# EAGLE board actpcb (EAGLE 4.11)
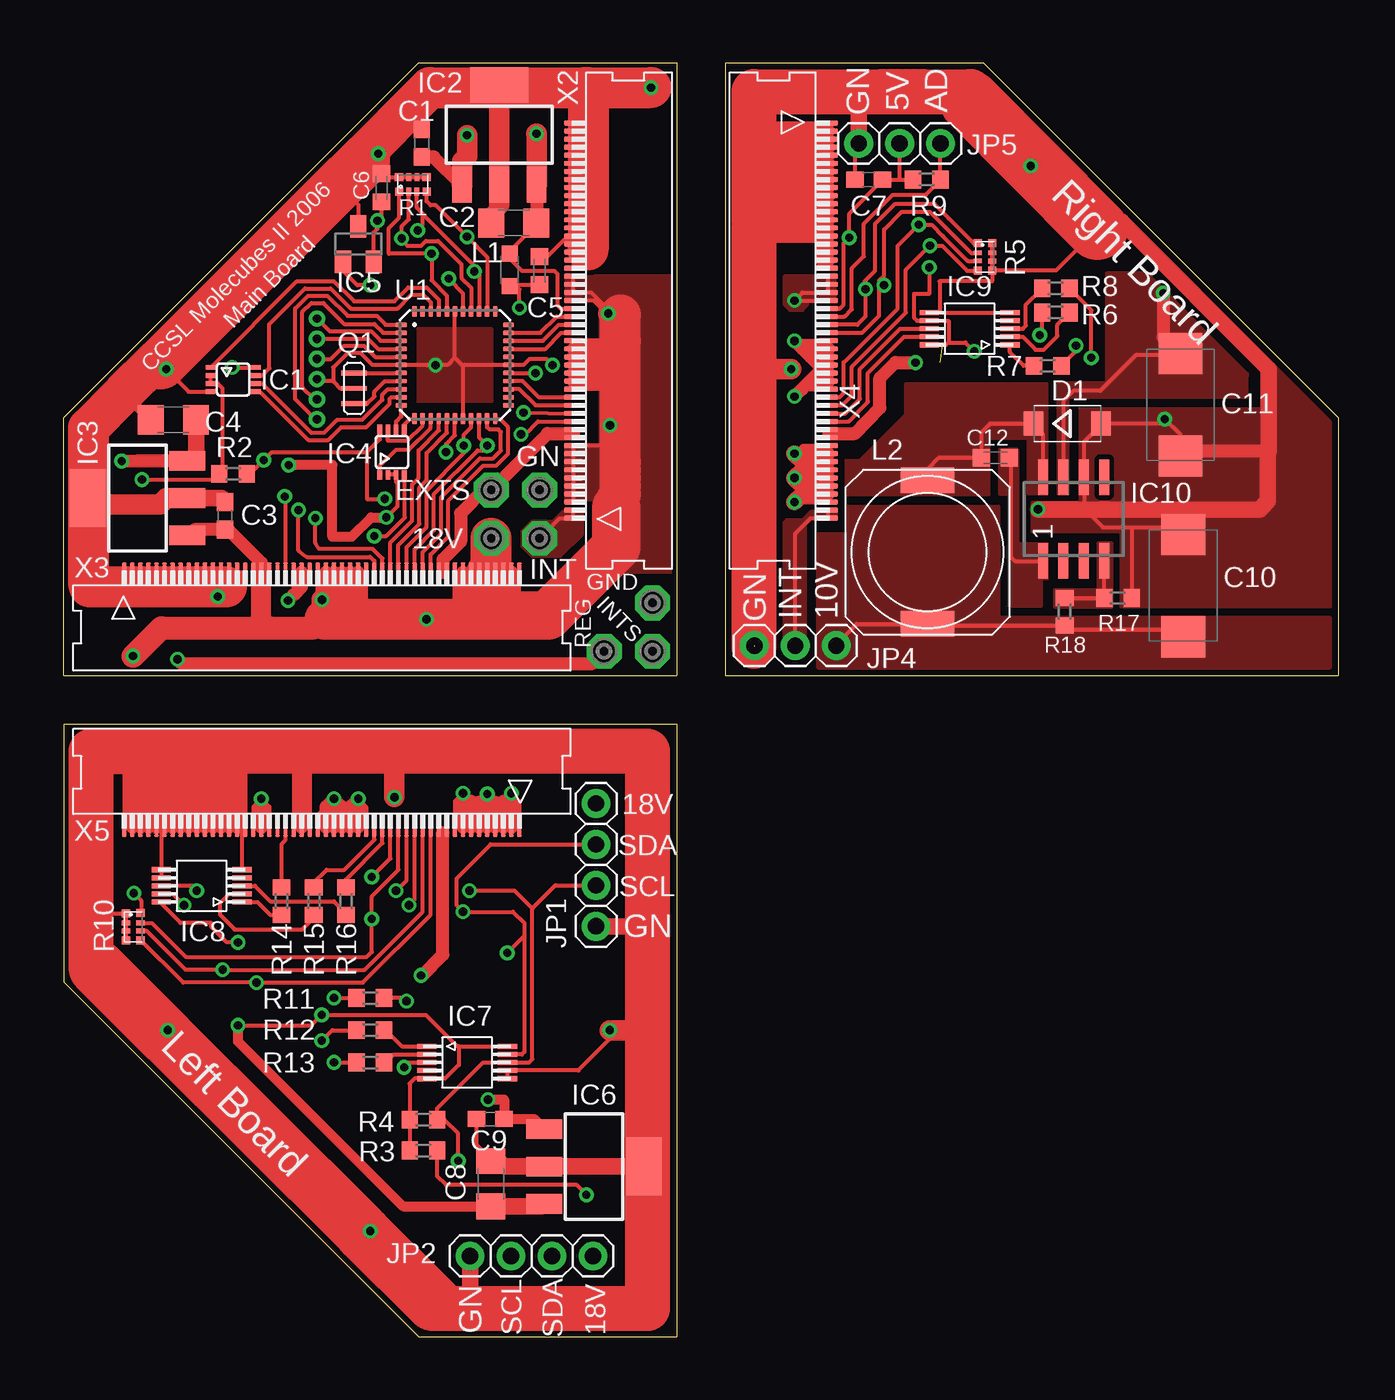
[diagram p0: board, top side]
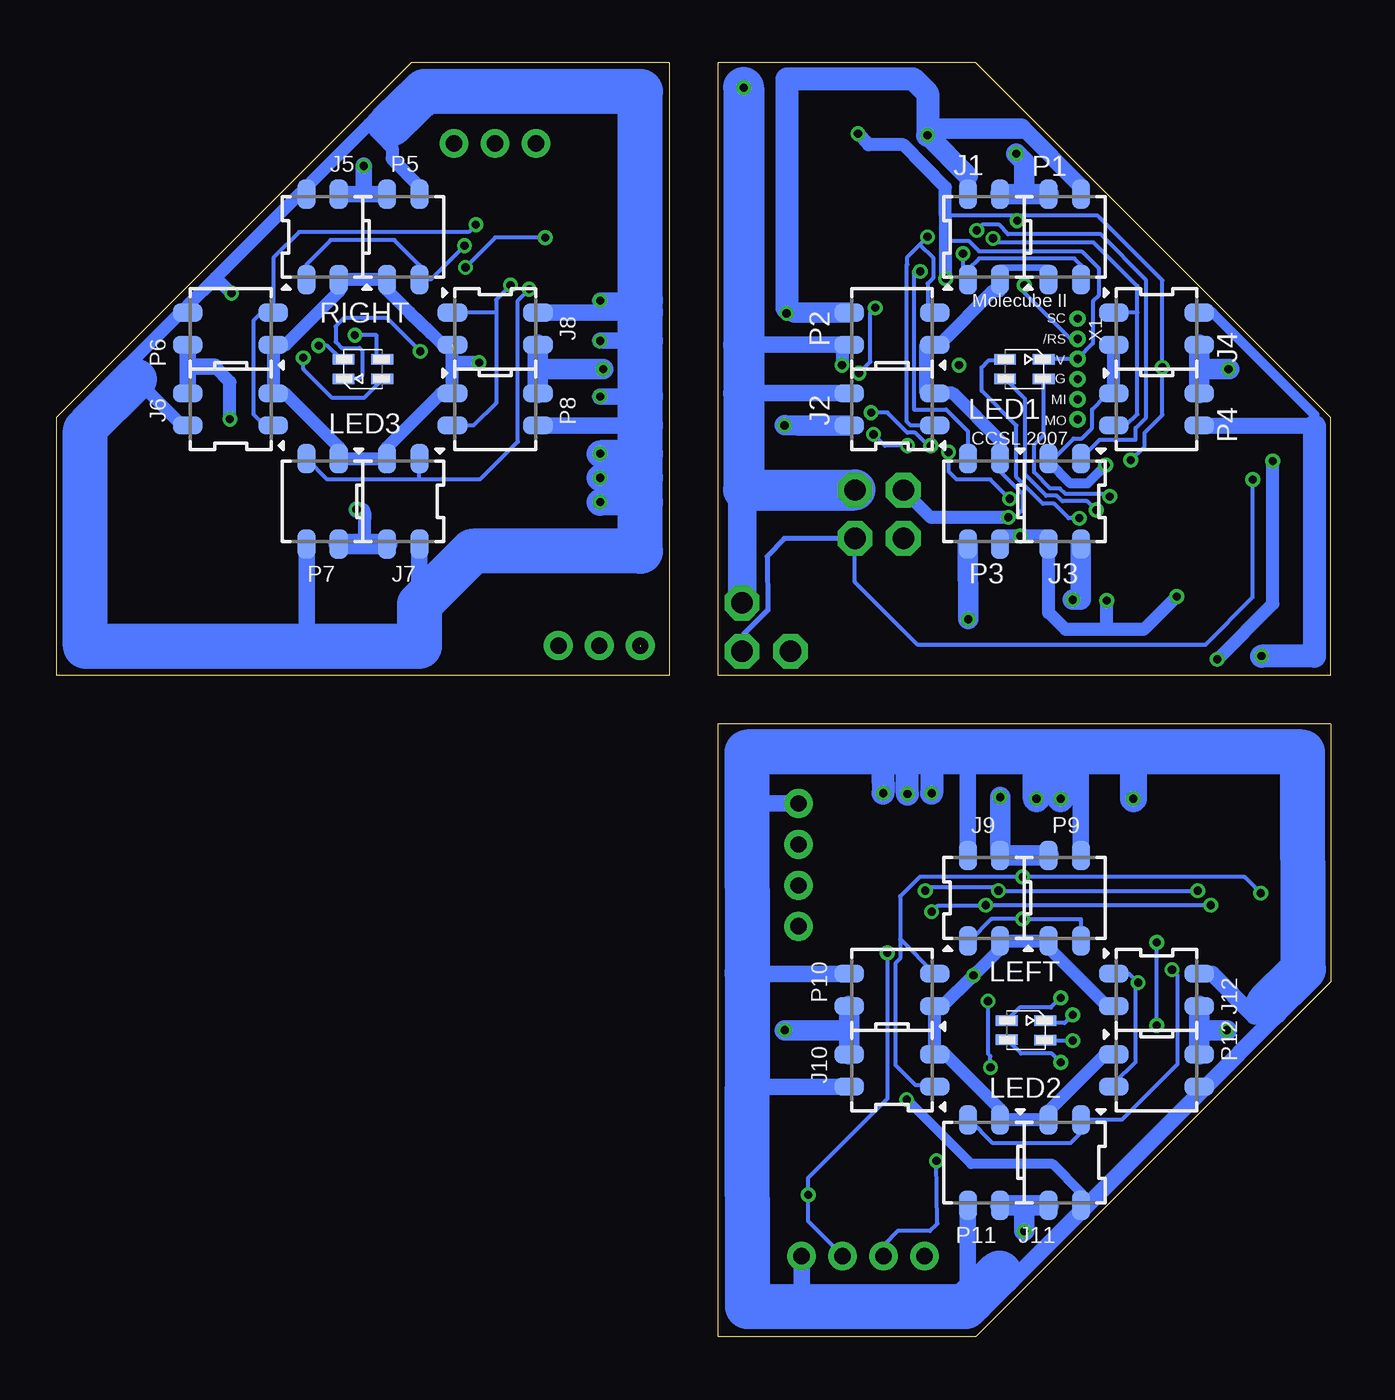
[diagram p1: board, bottom side, seen from below]

Size 79 x 79 mm. Coordinates in mm from the lower left corner, seen from the top.
Outline: 0,41 0,57 22,79 38,79 38,41 0,41
Outline: 38,38 38,0 22,0 0,22 0,38 38,38
Outline: 41,79 57,79 79,57 79,41 41,41 41,79
Copper layers (1*16): Top 0.035mm / dielectric 1.5mm / Bottom 0.035mm
Design rules "default": minimum track width 10mil, minimum drill 16mil, track to track 7mil, track to pad 7mil, pad to pad 7mil, via to via 7mil, smd to smd 7mil, copper to edge 10mil, drill to drill 8mil, minimum pad ring 10mil, minimum via ring 8mil, stop-mask expansion 4mil, vias tented up to drill 0mil, thermal gap 10mil

## Footprints (pad centres in the part's own frame; a part is rotated, then mirrored left to right if it is on the bottom)
MCS10B = drill 1.321 pad 2.159 octagon: MP 0,0
C0603 = smd 1.1 x 1: 1 -0.85,0; 2 0.85,0
C1206 = smd 1.6 x 1.8: 1 -1.4,0; 2 1.4,0
C0603K = smd 1.05 x 1.08: 1 -0.875,0; 2 0.875,0
D/7343-31R = smd 2.55 x 2.7: + 3.175,0; - -3.175,0
SMA = smd 1.2 x 1.5: A 2.1,0; C -2.1,0
VSSOP-8 = smd 0.3 x 0.6: 1 -0.75,-1.4; 2 -0.25,-1.4; 3 0.25,-1.4; 4 0.75,-1.4; 5 0.75,1.4; 6 0.25,1.4; 7 -0.25,1.4; 8 -0.75,1.4
SOT223 = smd 1.219 x 2.235: 1 -2.311,-3.099; 2 0,-3.099; 3 2.311,-3.099 | smd 3.6 x 2.2: 4 0,3.099
SOT23C = smd 1 x 1.4: 1 -0.95,-1.1; 2 0.95,-1.1; 3 0,1.1
TSSOP10 = smd 0.32 x 1.2: P$1 -1,-2.5; P$2 -0.5,-2.5; P$3 0,-2.5; P$4 0.5,-2.5; P$5 1,-2.5; P$6 1,2.5; P$7 0.5,2.5; P$8 0,2.5; P$9 -0.5,2.5; P$10 -1,2.5
SOP-08 = smd 0.6 x 2.2: 1 -1.905,-2.6; 2 -0.635,-2.6; 3 0.635,-2.6; 4 1.905,-2.6; 5 1.905,2.6; 6 0.635,2.6; 7 -0.635,2.6; 8 -1.905,2.6
79109-04 = smd 1.12 x 1.83: 1 -1,-2.65; 2 -1,2.65; 3 1,-2.65; 4 1,2.65
1X04R = drill 1.016 pad 1.778 round: 1 -3.81,0; 2 -1.27,0; 3 1.27,0; 4 3.81,0
1X03R = drill 1.016 pad 1.778 round: 1 -2.54,0; 2 0,0; 3 2.54,0
L2012C = smd 1 x 1: 1 -1,0; 2 1,0
DR1050 = smd 3.3 x 1.6: 1 0,4.45; 2 0,-4.45
OVSTRGBAC6V2 = smd 1.35 x 0.65: 1 -1.2,-0.6; 2 -1.2,0.6; 3 1.2,-0.595; 4 1.2,0.598
79109-041 = smd 1.12 x 1.83: 1 -1,-2.65; 2 -1,2.65; 3 1,-2.65; 4 1,2.65
CSTCE = smd 0.3 x 1.6: 1 -0.95,0; 2 0,0; 3 0.95,0
0402X4 = smd 0.5 x 0.5: 1 -0.845,-0.45; 4 0.853,-0.45; 5 0.848,0.45; 8 -0.855,0.45 | smd 0.3 x 0.5: 2 -0.25,-0.45; 3 0.245,-0.45; 6 0.255,0.45; 7 -0.25,0.45
R0603 = smd 1 x 1.1: 1 -0.85,0; 2 0.85,0
MLF44@1 = smd 0.7 x 0.3: 1 -3.325,2.5; 2 -3.325,2; 3 -3.325,1.5; 4 -3.325,1; 5 -3.325,0.5; 6 -3.325,0; 7 -3.325,-0.5; 8 -3.325,-1; 9 -3.325,-1.5; 10 -3.325,-2; 11 -3.325,-2.5; 23 3.325,-2.5; 24 3.325,-2; 25 3.325,-1.5; 26 3.325,-1; 27 3.325,-0.5; 28 3.325,0; 29 3.325,0.5; 30 3.325,1; 31 3.325,1.5; 32 3.325,2; 33 3.325,2.5 | smd 0.3 x 0.7: 12 -2.5,-3.325; 13 -2,-3.325; 14 -1.5,-3.325; 15 -1,-3.325; 16 -0.5,-3.325; 17 0,-3.325; 18 0.5,-3.325; 19 1,-3.325; 20 1.5,-3.325; 21 2,-3.325; 22 2.5,-3.325; 34 2.5,3.325; 35 2,3.325; 36 1.5,3.325; 37 1,3.325; 38 0.5,3.325; 39 0,3.325; 40 -0.5,3.325; 41 -1,3.325; 42 -1.5,3.325; 43 -2,3.325; 44 -2.5,3.325
53047-06V1 = drill 0.508 pad 0.698 round: 1 3.125,0; 2 1.875,0; 3 0.625,0; 4 -0.625,0; 5 -1.875,0; 6 -3.125,0
05A02-50SM = smd 0.3 x 1.2: 1 -12.25,2.4; 2 -11.75,2.4; 3 -11.25,2.4; 4 -10.75,2.4; 5 -10.25,2.4; 6 -9.75,2.4; 7 -9.25,2.4; 8 -8.75,2.4; 9 -8.25,2.4; 10 -7.75,2.4; 11 -7.25,2.4; 12 -6.75,2.4; 13 -6.25,2.4; 14 -5.75,2.4; 15 -5.25,2.4; 16 -4.75,2.4; 17 -4.25,2.4; 18 -3.75,2.4; 19 -3.25,2.4; 20 -2.75,2.4; 21 -2.25,2.4; 22 -1.75,2.4; 23 -1.25,2.4; 24 -0.75,2.4; 25 -0.25,2.4; 26 0.25,2.4; 27 0.75,2.4; 28 1.25,2.4; 29 1.75,2.4; 30 2.25,2.4; 31 2.75,2.4; 32 3.25,2.4; 33 3.75,2.4; 34 4.25,2.4; 35 4.75,2.4; 36 5.25,2.4; 37 5.75,2.4; 38 6.25,2.4; 39 6.75,2.4; 40 7.25,2.4; 41 7.75,2.4; 42 8.25,2.4; 43 8.75,2.4; 44 9.25,2.4; 45 9.75,2.4; 46 10.25,2.4; 47 10.75,2.4; 48 11.25,2.4; 49 11.75,2.4; 50 12.25,2.4

## Placement (x,y rotation side)
18V  MCS10B  [MCS10B]  26.5,49.5 0 top
C1  [C0603]  22.2,74 90 top
C2  [C1206]  27.9,69.05 180 top
C3  [C0603]  10,50.9 90 top
C4  [C1206]  6.8,56.85 180 top
C5  [C0603K]  29.5,66.1 270 top
C6  [C0603K]  19.71,71.24 90 top
C7  [C0603]  49.9,71.75 180 top
C8  [C1206]  26.48,9.48 90 top
C9  [C0603]  26.44,13.5 180 top
C10  [D/7343-31R]  69.4,46.57 270 top
C11  [D/7343-31R]  69.23,57.78 90 top
C12  [C0603K]  57.75,54.5 180 top
D1  [SMA]  62.21,56.62 0 top
EXTS  1W  [MCS10B]  26.5,52.5 0 top
GN  MCS10B  [MCS10B]  29.5,52.5 0 top
GND  MCS10B  [MCS10B]  36.5,45.5 0 top
IC1  [VSSOP-8]  10.5,59.35 270 top
IC2  [SOT223]  27,74.53 0 top
IC3  [SOT223]  4.57,52 90 top
IC4  [VSSOP-8]  20.35,54.85 0 top
IC5  [SOT23C]  18.26,67.74 0 top
IC6  [SOT223]  32.88,10.55 270 top
IC7  PCA9633  [TSSOP10]  25,17 270 top
IC8  PCA9633  [TSSOP10]  8.55,27.95 90 top
IC9  PCA9633  [TSSOP10]  56.15,62.5 90 top
IC10  LM2675SOP08  [SOP-08]  62.6,50.7 0 top
INT  MCS10B  [MCS10B]  29.5,49.5 0 top
INTS  MCS10B  [MCS10B]  36.5,42.5 0 top
J1  [79109-04]  21.5,68.2 0 bottom
J2  [79109-04]  27.2,57.5 90 bottom
J3  [79109-04]  16.5,51.8 180 bottom
J4  [79109-04]  10.8,62.5 270 bottom
J5  [79109-04]  62.5,68.2 0 bottom
J6  [79109-04]  68.2,57.5 90 bottom
J7  [79109-04]  57.5,51.8 180 bottom
J8  [79109-04]  51.8,62.5 270 bottom
J9  [79109-04]  21.5,27.2 0 bottom
J10  [79109-04]  27.2,16.5 90 bottom
J11  [79109-04]  16.5,10.8 180 bottom
J12  [79109-04]  10.8,21.5 270 bottom
JP1  [1X04R]  33,29.25 90 top
JP2  [1X04R]  29,5 0 top
JP4  [1X03R]  45.35,42.85 0 top
JP5  [1X03R]  51.82,73.99 0 top
L1  [L2012C]  27.65,66.15 270 top
L2  [DR1050]  53.55,48.65 0 top
LED1  [OVSTRGBAC6V2]  19,60 180 bottom
LED2  [OVSTRGBAC6V2]  18.9,19 180 bottom
LED3  [OVSTRGBAC6V2]  60,60 0 bottom
P1  [79109-041]  16.5,68.2 0 bottom
P2  [79109-041]  27.2,62.5 90 bottom
P3  [79109-041]  21.5,51.8 180 bottom
P4  [79109-041]  10.8,57.5 270 bottom
P5  [79109-041]  57.5,68.2 0 bottom
P6  [79109-041]  68.2,62.5 90 bottom
P7  [79109-041]  62.5,51.8 180 bottom
P8  [79109-041]  51.8,57.5 270 bottom
P9  [79109-041]  16.5,27.2 0 bottom
P10  [79109-041]  27.2,21.5 90 bottom
P11  [79109-041]  21.5,10.8 180 bottom
P12  [79109-041]  10.8,16.5 270 bottom
Q1  [CSTCE]  18,58.8 270 top
R1  [0402X4]  21.64,71.46 0 top
R2  [R0603]  10.5,53.5 180 top
R3  [R0603]  22.3,11.55 0 top
R4  [R0603]  22.3,13.45 0 top
R5  [0402X4]  57.1,66.95 270 top
R6  [R0603]  61.5,63.5 180 top
R7  [R0603]  61,60.2 0 top
R8  [R0603]  61.5,65 0 top
R9  [R0603]  53.5,71.75 0 top
R10  [0402X4]  4.31,25.41 270 top
R11  [R0603]  19,21 180 top
R12  [R0603]  19,19 180 top
R13  [R0603]  19,17 180 top
R14  [R0603]  13.5,27 90 top
R15  [R0603]  15.5,27 90 top
R16  [R0603]  17.5,27 90 top
R17  [R0603]  65.35,45.8 180 top
R18  [R0603]  62.05,44.95 270 top
REG  MCS10B  [MCS10B]  33.5,42.5 0 top
U1  [MLF44@1]  24.25,60.25 0 top
X1  [53047-06V1]  15.7,60 270 bottom
X2  [05A02-50SM]  34,63 90 top
X3  [05A02-50SM]  16,45 0 top
X4  [05A02-50SM]  45,63 270 top
X5  [05A02-50SM]  16,34 180 top

## Library data of the parts
18V EXTS GN GND INT INTS REG = solpad
C1-C12 L1 L2 R2-R4 R6-R9 R11-R18 = rcl
D1 = diode
IC1 IC4 = 74xx-us
IC2 IC3 IC6 = linear-technology
IC5 = linear-technology-2
IC7-IC9 LED1-LED3 = rgb_led
IC10 = v-reg
J1-J12 P1-P12 = con-headers-jp
JP1 JP2 JP4 JP5 = pinhead
Q1 = murata-resonators
R1 R5 R10 = resistor-bourns
U1 = atmel
X1 = con-molex
X2-X5 = con-jst

## Nets
10V-R: C10.+ JP4.3 L2.2 R18.2
18V-L: C9.1 IC6.1 J9.2 J10.2 J11.2 J12.2 JP1.4 JP2.4 P9.4 P10.4 P11.4 P12.4 X5.1 X5.2 X5.3 X5.4 X5.5 X5.6 X5.7 X5.8 X5.9 X5.20 X5.21 X5.22 X5.23 X5.24 X5.25 X5.26 X5.32 X5.33 X5.34
+18V: 18V.MP C1.1 C3.1 IC2.1 IC3.1 J1.2 J2.2 J3.2 J4.2 P1.4 P2.4 P3.4 P4.4 X2.3 X2.4 X2.5 X2.6 X2.7 X2.8 X2.9 X2.10 X2.17 X2.18 X2.19 X2.20 X2.21 X2.22 X2.23 X2.28 X2.29 X2.30 X2.31 X3.17 X3.18 X3.19 X3.25 X3.26 X3.27 X3.28 X3.29 X3.30 X3.31 X3.42 X3.43 X3.44 X3.45 X3.46 X3.47 X3.48 X3.49 X3.50
ADC-R: JP5.3 R9.2 X4.25
BCH_M: LED1.3 X3.33
GCH_M: LED1.4 X3.32
GND: C1.2 C2.2 C3.2 C4.2 C5.1 C6.2 GN.MP GND.MP IC1.4 IC2.2 IC2.4 IC3.2 IC3.4 IC4.4 IC5.3 J1.4 J2.4 J3.4 J4.4 P1.2 P2.2 P3.2 P4.2 Q1.2 R1.5 R1.6 R1.7 R1.8 U1.6 U1.18 U1.28 U1.39 X1.3 X2.32 X2.33 X2.34 X2.35 X2.36 X2.37 X2.38 X2.39 X2.40 X2.41 X2.42 X2.43 X2.44 X2.45 X2.46 X2.47 X2.48 X2.49 X2.50 X3.1 X3.2 X3.3 X3.4 X3.5 X3.6 X3.7 X3.8 X3.9 X3.10 X3.11 X3.12 X3.13 X3.14 X3.15 X3.16 X3.22 X3.23 X3.24
GND-R: C7.2 C10.- C11.- D1.A IC9.P$5 IC9.P$6 IC10.6 J5.4 J6.4 J7.4 J8.4 JP4.1 JP5.1 P5.2 P6.2 P7.2 P8.2 R5.5 R5.6 R5.7 R5.8 R17.1 X4.1 X4.2 X4.3 X4.4 X4.5 X4.6 X4.7 X4.8 X4.9 X4.10 X4.11 X4.12 X4.13 X4.14 X4.15 X4.16 X4.17 X4.18 X4.19
GND_2: C8.2 C9.2 IC6.2 IC6.4 IC7.P$6 IC7.P$7 IC8.P$5 IC8.P$6 IC8.P$7 J9.4 J10.4 J11.4 J12.4 JP1.1 JP2.1 P9.2 P10.2 P11.2 P12.2 R10.1 R10.2 R10.3 R10.4 X5.27 X5.28 X5.29 X5.35 X5.36 X5.37 X5.38 X5.39 X5.40 X5.41 X5.42 X5.43 X5.44 X5.45 X5.46 X5.47 X5.48 X5.49 X5.50
INTS: IC1.2 IC1.3 INT.MP INTS.MP R2.2 X2.1 X2.2
N$1: Q1.1 U1.7
N$2: Q1.3 U1.8
N$3: IC1.6 U1.9
N$4: IC1.5 U1.10
N$6: IC4.6 U1.11
N$7: IC4.5 U1.12
N$8: IC7.P$1 R12.1
N$9: IC4.1 U1.14
N$10: U1.20 X2.13 X3.37
N$11: IC4.7 U1.13
N$12: U1.22 X3.39
N$13: U1.21 X3.38
N$14: U1.2 X1.2
N$15: U1.1 X1.1
N$16: U1.16 X3.35
N$17: U1.15 X3.34
N$18: U1.19 X2.14 X3.36
N$19: LED2.2 R12.2
N$20: IC9.P$8 X4.37
N$21: IC9.P$9 X4.38
N$22: C12.1 IC10.1
N$23: IC7.P$2 R13.1
N$24: J2.1 P2.3 R1.4 U1.35
N$25: IC7.P$3 R11.1
N$26: J1.1 P1.3 R1.1 U1.40
N$27: U1.30 X2.24
N$28: U1.31 X2.25
N$29: U1.32 X2.26
N$30: JP4.2 X4.49 X4.50
N$31: U1.25 X2.15
N$32: U1.3 X1.6
N$33: J3.1 P3.3 R1.3 U1.36
N$34: U1.26 X2.16
N$35: IC9.P$1 R7.1
N$36: EXTS.MP IC4.2 IC4.3 J1.3 J2.3 J3.3 J4.3 P1.1 P2.1 P3.1 P4.1 X2.11 X2.12 X3.40 X3.41
N$37: IC5.1 U1.4 X1.5
N$38: IC1.7 U1.42
N$39: LED3.2 R7.2
N$40: J4.1 P4.3 R1.2 U1.37
N$41: IC1.1 U1.41
N$42: IC10.4 R17.2 R18.1
N$43: IC9.P$2 R6.1
N$44: LED3.4 R6.2
N$45: J7.1 P7.3 R5.1 X4.26
N$46: J5.3 J6.3 J7.3 J8.3 P5.1 P6.1 P7.1 P8.1 X4.39 X4.40
N$47: IC9.P$3 R8.1
N$48: J8.1 P8.3 R5.2 X4.27
N$49: LED2.3 R11.2
N$50: J6.1 P6.3 R5.3 X4.35
N$51: LED2.4 R13.2
N$52: J5.1 P5.3 R5.4 X4.36
N$54: J9.3 J10.3 J11.3 J12.3 P9.1 P10.1 P11.1 P12.1 X5.10 X5.11
N$56: LED3.3 R8.2
N$57: C12.2 D1.C IC10.8 L2.1
N$58: IC8.P$1 R14.1
N$59: C11.+ IC10.7 J5.2 J6.2 J7.2 J8.2 P5.4 P6.4 P7.4 P8.4 X4.20 X4.21 X4.22 X4.23 X4.28 X4.29 X4.30 X4.31 X4.32 X4.33 X4.34 X4.41 X4.42 X4.43 X4.44 X4.45 X4.46 X4.47 X4.48
N$60: IC8.P$2 R15.1
N$61: IC8.P$3 R16.1
N$62: R14.2 X5.30
N$63: J9.1 P9.3 R10.7 X5.16
N$64: J11.1 P11.3 R10.6 X5.13
N$65: R15.2 X5.19
N$66: J12.1 P12.3 R10.5 X5.12
N$67: R16.2 X5.18
N$68: C4.1 IC3.3 REG.MP
N$69: C2.1 C6.1 IC1.8 IC2.3 IC4.8 IC5.2 L1.1 LED1.1 R2.1 U1.5 U1.17 U1.38 X1.4 X2.27
N$75: C5.2 L1.2 U1.27
N$100: J10.1 P10.3 R10.8 X5.17
RCH_M: LED1.2 X3.21
SCL-L: IC7.P$8 IC8.P$8 JP1.2 JP2.2 R4.2 X5.15
SDA-L: IC7.P$9 IC8.P$9 JP1.3 JP2.3 R3.2 X5.14
VDD-R: C7.1 IC9.P$7 IC9.P$10 JP5.2 LED3.1 R9.1 X4.24
VDD_2: C8.1 IC6.3 IC7.P$5 IC7.P$10 IC8.P$10 LED2.1 R3.1 R4.1

## Tracks (layer width: path | path; a pad name or v marks a point on that pad's centre or on a via)
10V-R
  Top 0.254: C10.+ 69.4,43.65 69.2,43.85 62.3,43.84 R18.2 54.35,44.1 L2.2 49.15,44.2 47.85,42.9 JP4.3
  pour Top (isolate 0.254, no thermals): 46.75,49.75 46.75,41.5 78.5,41.5 78.5,44.55 57.95,44.55 57.95,51.45 48.5,51.45 48.5,49.75
18V-L  (via drill 0.51)
  Top 0.254: X5.20 18.75,32.85 v18.25,33.35 | X5.23 X5.22 | X5.34 11.75,32.85 v12.25,33.35 12.75,32.85 X5.32 | X5.26 15.75,32.35 16.25,32.85 | X5.9 24.25,33.2 v24.75,33.7 25.25,33.2 | 25.75,33.15 v26.25,33.65 26.75,33.15 | 27.25,33.2 v27.75,33.7 28.25,33.2 X5.1 | X5.7 X5.6 | IC6.1
  Top 0.61: IC6.1 29.15,13.5 C9.1 27.29,13.59 27.3,13.6 27.3,14.7 v26.3,14.7
  Top 0.813: X5.22 17.75,32.85 v18.25,33.35 X5.21 | v27.75,33.7 X5.2 | X5.25 16.25,32.85 v16.75,33.35 | v16.75,33.35 X5.24 | X5.23 17.25,32.85 v16.75,33.35 | v12.25,33.35 X5.33 | X5.6 25.75,33.15 | v26.25,33.65 X5.5 | v24.75,33.7 X5.8 | 25.25,33.2 X5.7 | 26.75,33.15 X5.4 | 27.25,33.2 X5.3
  Bottom 0.254: 36.35,33.05 | 36.2,33.05 36.35,33.05 | 36.35,33.05 36.34,33.06 | 32.8,1.85 32.81,1.86
  Bottom 0.61: 15.44,7.79 15.44,8.89 17.25,10.7 22.3,10.7 v26.3,14.7
  Bottom 0.813: 3.9,20.6 3.5,19.75
  Bottom 1.016: 20.55,3.95 19.75,3.5 15.44,7.79 | 7.9,15.35 15.44,7.79 | 3.5,19.75 7.9,15.35 | J11.2 15.5,7.9 15.44,7.79 | 22.5,2.5 P11.4 | 36.18,22.55 36.15,22.55 36.1,22.5 P10.4 | 36.17,15.5 J10.2 | 22.5,36.25 J9.2 | 15.5,36.25 P9.4 | 2,22.5 2.05,22.55 4.75,19.85 7.35,22.5 J12.2 | P12.4 8.05,15.5 7.9,15.35 | 36.34,33.06 JP1.4 | 32.81,1.86 JP2.4
  Bottom 1.27: 22.25,2.25 22.5,2.5
  Bottom 1.422: 27.8,36.25 v27.75,33.7 | 24.75,36.25 v24.75,33.7 | v26.25,33.65 26.25,36.25
  Bottom 1.676: v18.25,33.35 18.25,35.75 | 16.75,36.25 v16.75,33.35 | 12.25,36.25 v12.25,33.35
  Bottom 2.8: 20.55,3.95 22.25,2.25 22.65,1.85 32.8,1.85 36.15,1.85 36.17,15.5 36.18,22.55 36.2,33.05 36.2,36.25 27.8,36.25 24.75,36.25 22.5,36.25 16.75,36.25 15.5,36.25 12.25,36.25 1.75,36.25 1.7,22.8 2,22.5 3.9,20.6
+18V  (via drill 0.51)
  Top 0.254: X3.46 26.5,47.4 | 26.3,44.45 | 26.3,44.5 26.3,44.45 | 26.3,44.45 26.25,44.5 | 24.25,44.55 | 24.25,44.49 24.25,44.55 | 24.25,44.55 X3.42 | 25.75,44.49 X3.45 | 30,44.7 28.2,44.7 28.25,44.65 X3.50 | 18.25,44.55 | 18.25,44.49 18.25,44.55 | 17.75,44.6 | 17.75,44.49 17.75,44.6 | 11.75,43.9 11.75,43.95 X3.17 | 12.75,43.95 X3.19 | 18.75,44.49 X3.31 | 33.65,63.45 33.65,63.5 33.7,63.45 v33.75,63.45 33.95,63.5 32.7,64.75 X2.29 X2.30 X2.31 | 33.65,63.45 33.4,63.25 | 34.25,48.95 34.2,50.75 | 34.45,51.25 | 34.25,51.4 34.45,51.25 | 34.55,51.75 | 34.25,51.9 34.55,51.75 | 34.55,52.25 | 34.5,52.25 34.55,52.25 | 34.5,54.25 | 34.5,54.75 | 34.5,55.25 34.45,55.25 | 34.6,55.75 | 34.5,55.75 34.6,55.75 | 34.55,56.25 | 34.5,56.25 34.55,56.25 | 34.5,59.25 | 34.5,59.75 34.55,59.75 | 34.5,60.25 | 34.5,60.75 | 34.5,61.25 34.55,61.25 | 16.25,45.85 16.05,45.65 v16.01,45.69 15.96,45.69 15.75,45.9 X3.25 | 16.85,44.65 | 16.85,44.49 16.85,44.65 | 16.85,44.65 16.75,44.75 | 33.65,63.45 33.65,63.4 | X2.28 32.85,64.25 33.65,63.45 | 34.5,61.75 X2.23 | 34.5,60.3 34.45,60.25 | 34.5,58.75 X2.17 | IC3.1 7.65,49.7 7.75,49.7 | X2.3 X2.4 X2.5 X2.6 X2.7 X2.8 X2.9 X2.10 34.45,55.25 | 34.45,55.25 | 34.5,53.75
  Top 0.406: 24.69,72.89 24.95,73.15 24.95,74.45 v25,74.5
  Top 0.813: C1.1 22.95,73.15 24.7,71.4 | 16.01,44.5 15.5,44.5 15.5,43.95 | 24.75,44.49 X3.43 | 25.25,44.49 X3.44 | 26.75,44.5 X3.47 | 27.25,44.5 X3.48 | 27.75,44.5 X3.49 | 12.25,43.95 X3.18 12.25,48 10.2,50.05 C3.1 8.11,50.04 7.75,49.7 | 17.25,44.49 X3.28 | 17.75,44.49 X3.29 | 18.25,44.49 X3.30 | 16.25,45.85 X3.26 | 16.75,44.75 X3.27 | 34.5,61.25 X2.22 | 34.5,60.75 X2.21 | 34.45,60.25 X2.20 | 34.5,59.75 X2.19 | 34.5,59.25 X2.18
  Top 1.27: 16.21,44.49 16.01,44.5 v16.01,45.69 | 34.49,56.51 v33.86,56.51 | v25,74.5 25,73.2 24.95,73.15 24.7,72.9 24.7,71.45 | 24.7,71.4 24.7,71.45 | 34.5,63.35 v33.75,63.45 | IC2.1 24.7,71.45
  Top 1.422: 15.5,43.95 12.75,43.95 12.25,43.95 11.75,43.95 6.05,43.95 v4.3,42.2
  Top 2.54: 27.7,44.7 27.75,44.5 27.25,44.5 26.75,44.5 26.3,44.5 25.75,44.49 25.25,44.49 24.75,44.49 24.25,44.49 v22.49,44.49 18.75,44.49 18.25,44.49 | 18.25,44.49 | 17.75,44.49 18.25,44.49 | 17.75,44.49 | 17.75,44.49 17.25,44.49 17.45,44.49 16.85,44.49 16.21,44.49 | 34.25,51.4 34.25,51.9 34.5,52.25 34.5,52.75 34.5,53.25 34.5,53.75 34.5,54.25 34.5,54.75 34.5,55.25 | 34.5,55.25 | 34.5,55.25 34.5,55.75 34.5,56.25 34.49,56.51 34.5,58.75 34.5,59.25 34.5,59.75 34.5,60.25 34.5,60.3 34.5,60.75 34.5,61.25 34.5,61.75 34.5,63.35 | 26.5,47.4 18V.MP | 26.25,44.5 X3.46
  Top 3: 27.7,44.7 30,44.7 34.25,48.95 34.25,51.4
  Bottom 0.254: 33.24,63.51 33.29,64.96 33.3,64.95 v33.75,63.45
  Bottom 0.61: 15.5,71.35 P1.4 | v25,74.5 25,74.85 24.95,74.9 | 19.2,74.9 19.05,74.9 | J4.2 7.35,63.5 1,57.15 1,56.45
  Bottom 1.016: 22.5,72 J1.2 | 19.05,74.9 15.5,71.35 | 0.95,56.5 1,56.45 P4.4
  Bottom 1.27: v16.01,45.69 15.5,45.7 J3.2 | 33.7,63.8 33.24,63.51 P2.4 | v33.86,56.51 33,56.5 J2.2 | v22.49,44.49 P3.4 | v25,74.5 22.5,72 | 24.95,74.9 19.2,74.9
  Bottom 1.422: v25,74.5 25,77.1 25.9,78 33.7,78 33.7,63.8 | 1,56.45 1,42.2 v4.3,42.2
  pour Top (isolate 0.305, no thermals): 31.2,55.25 33.7,55.25 33.7,51.9 31.15,51.9 31.15,55.25 31.25,55.25
  pour Top (isolate 0.305, no thermals): 31.15,65.75 37.65,65.75 37.65,47.4 33.3,47.4 33.3,64.25 31.15,64.25
ADC-R
  Top 0.254: X4.25 48.4,63.25 48.85,63.7 48.85,66.25 49.45,66.85 49.6,67 49.6,69 51.4,70.8 53.45,70.8 54.35,71.7 R9.2 54.35,73.95 54.36,73.96 JP5.3
BCH_M  (via drill 0.51)
  Top 0.254: X3.33 19.75,48.25 19.15,48.85 15.85,48.85 15.6,49.2 v15.6,50.75
  Bottom 0.254: v15.6,50.75 16.25,50.75 17.15,51.65 17.85,51.65 19.5,53.3 19.5,56.5 21.65,58.65 21.65,60.1 21.2,60.55 20.2,60.55 LED1.3
GCH_M  (via drill 0.51)
  Top 0.254: X3.32 19.25,48.1 19,48.35 15.05,48.35 14.55,48.75 v14.55,51.25
  Bottom 0.254: v14.55,51.25 15.1,51.8 16.65,51.8 17,52.15 17.65,52.15 18.95,53.45 18.95,58.15 LED1.4
GND  (via drill 0.51, 0.51 pad 0.25)
  Top 0.254: X3.1 X3.2 X3.3 X3.4 5.7,47.4 | 5.7,47.4 X3.5 | 5.7,47.4 X3.6 X3.7 X3.8 X3.9 X3.10 | X3.10 8.3,47.4 | X3.11 8.8,47.4 | X3.11 X3.10 | X3.12 9.3,47.4 | X3.12 X3.11 | X3.13 9.8,47.4 | X3.13 X3.12 | X3.14 X3.13 | X3.14 X3.15 X3.16 | X3.14 10.25,46.65 10.1,46.5 | v19.5,73.35 19.1,72.4 | 19.1,72.4 19.25,72.25 | 19.3,71.5 19.3,72.1 19.25,72.15 19.25,72.3 18.95,72.6 | 18.62,72.92 18.95,72.6 | 32.5,77.4 32.5,77.45 | X3.22 14.25,46 v13.9,45.65 | X3.24 15.25,47 14.75,46.5 | 32.55,68.25 32.5,68.25 X2.36 | 32.65,67.75 32.5,67.75 X2.35 X2.34 X2.33 X2.32 | v30.3,60.25 29.95,60.6 28.85,60.6 28.5,60.25 27.6,60.25 27.57,60.23 27.55,60.25 | Q1.2 17.15,58.8 16.7,59.25 | 16.7,59.25 16.7,60.1 17.6,61 18.4,61 19.15,60.25 U1.6 22.5,60.25 | 24.25,60.7 23.8,60.25 22.5,60.25 | 24.25,60.7 24.7,60.25 24.75,60.25 | 27.55,60.25 24.75,60.25 | 24.75,60.25 U1.18 | 22.5,60.25 v23.05,60.25 | 24.25,60.7 U1.39 | 27,75.55 27,75.5 27,74.7 | X1.3 15.73,59.38 15.85,59.25 16.7,59.25 | IC1.4 7.75,58.6 v6.35,60 | R1.5 21.91,71.91 R1.6 21.41,71.91 R1.7 20.86,71.91 20.85,71.9 20.84,71.91 R1.8 19.59,71.91 19.1,72.4 | 16.5,70.8 17.11,70.79 | C6.2 19.29,72.27 18.95,72.6 | IC5.3 18.26,70.19 17.6,70.85 16.95,70.85 16.75,71.05 | IC4.4 21.15,53.4 21.15,50.8 20,49.65 v19.25,49.65 | C5.1 29.98,66.97 31,68 31.6,68 | 5.35,56.85 C4.2 | 27.55,60.25 U1.28 | 27,77.5 IC2.4
  Top 0.305: 32.5,67.4 31.6,68 | X2.36 X2.37 X2.38 31.6,69.7 | 31.6,69.7 X2.39 | 31.6,69.7 X2.40 31.6,70.7 | 31.6,70.7 X2.41 | 31.6,70.7 X2.42 X2.43 X2.44 X2.45 X2.46 X2.47 X2.48 X2.49 X2.50
  Top 0.406: 27.5,77.45 27,77.6
  Top 0.61: 3.7,58.5 5.35,56.85
  Top 0.813: 27,70.2 26.4,69.6 C2.2 | 22.2,76.95 C1.2 | v9.55,45.9 8.7,45.9 8.7,46.5 | X3.23 14.75,46.5 14.25,46
  Top 1.016: 27,75.55 27,76.95 27.5,77.45 | C3.2 9.8,52 IC3.2 6.35,52
  Top 1.27: 27,77.6 27,77.5 27,75.55 | 1.55,52 1.55,51.6 5.95,51.6 6.35,52 | v6.35,60 6,60.35 4.05,59.1 | v19.5,73.35 18.62,72.92 18.25,73.25 | 27,75.5 IC2.2 27,70.2
  Top 1.422: 1.55,52 IC3.4 1.4,52
  Top 2.54: 18.62,72.92 18.52,73.28 22.2,76.95 22.7,77.45 27.5,77.45 32.3,77.45 32.5,77.4 32.5,68.25 32.5,67.75 32.5,67.4 | 6,60.35 5.7,60.5 3.7,58.5 1.55,56.35 1.55,52 1.55,46.7 1.6,46.5 8.7,46.5 10.1,46.5 | 32.5,77.45 v36.4,77.45
  Top 3.2: 18.62,72.92 16.75,71.05 16.5,70.8 6,60.35
  Bottom 0.254: P2.2 30.3,61.05 | v9.55,45.9 9.5,45.95
  Bottom 0.406: P2.2 29.9,61.5
  Bottom 0.813: 13.9,43.85 11.6,43.85 v9.55,45.9 | 13.9,43.85 16.45,43.85 17.5,44.9 J3.4 17.5,49.65 v19.25,49.65 20.55,49.65 20.5,49.6 P3.2 | 13.9,43.85 v13.9,45.65 | 30.3,61.05 v30.3,60.25
  Bottom 1.016: 36.4,61.5 P2.2 | 36.4,58.5 J2.4
  Bottom 1.27: 36.4,61.5 36.55,61.5 | 8.15,60 J4.4 | 6.3,60 v6.35,60 8.15,60 | 8.15,60 P4.2 | 19,70.85 P1.2 | v19.5,73.35 19,72.85 19,70.85 | 19,70.85 J1.4
  Bottom 1.778: 36.4,52.5 36.4,52.85 36.5,52.75 GND.MP
  Bottom 2.54: GN.MP 36.4,52.5 36.4,58.5 36.4,61.5 v36.4,77.45
  pour Top: 22,62.5 26.5,62.5 26.5,58 22,58
GND-R  (via drill 0.51)  (1 unrouted)
  Top 0.254: 46.75,75.25 X4.1 42.8,75.25 | X4.3 46.75,74.25 | X4.7 46.7,72.25 | X4.11 46.7,70.25 | X4.13 46.7,69.25 | X4.15 46.7,68.25 | 42.8,74.25 42.7,74.25 | 42.8,73.75 42.75,73.75 | 42.8,73.25 42.75,73.25 | 42.8,70.25 42.75,70.25 | 42.8,66.25 42.8,69.1 46.8,69.1 46.8,66.25 X4.19 | 50.75,77.2 50.75,77.25 50.76,77.25 | 51.25,77.2 51.25,77.25 | 51.75,77.2 51.75,77.3 51.74,77.3 | 52.25,77.2 52.25,77.35 | 52.75,77.2 52.75,77.3 | 53.25,77.2 53.25,77.25 53.26,77.25 | 56.23,76.58 61.04,72.14 | 61.04,72.14 63.3,70.05 | R5.8 R5.7 R5.6 R5.5 | 51.35,77.2 | 54.3,63.5 IC9.P$5 | 54.3,63.5 IC9.P$6 | 61.05,72.14 61.05,72.15 | 61.04,72.14 61.05,72.14 | 61.05,72.14 61.05,71.15 | 64.08,68.68 64.1,68.7 | 64.08,68.68 | R5.5 61.5,66.1 64.08,68.68 | JP5.1 49.3,74 | JP5.1 | C7.2 49.05,73.75 JP5.1 | 54.3,63.5 54.3,65.45 57.55,65.45 R5.5 | 66.2,50.2 64.41,50.2 63.25,51.35 63.25,51.4 | 66.2,50.2 69.05,50.2 69.4,49.85 C10.- | 63.25,51.4 63.25,53.1 63.2,53.15 63.23,53.19 IC10.6 63.23,55.48 64.31,56.56 D1.A 67.97,56.62 v68.25,56.9 69.23,55.92 69.23,54.9 C11.- | 66.2,50.2 | 66.2,50.2 R17.1 | 62.5,51.2 63.05,51.2 63.25,51.4
  Top 0.813: 42.8,74.75 X4.2 | 42.8,74.25 X4.3 | 42.8,73.75 X4.4 | 42.8,73.25 X4.5 | 42.8,72.75 X4.6 | 42.8,72.25 X4.7 | 42.8,71.75 X4.8 | 42.8,71.25 X4.9 | 42.8,70.75 X4.10 | 42.8,70.25 X4.11 | 42.8,69.75 X4.12 | 42.8,69.25 X4.13 | 42.8,68.75 X4.14 | 42.8,68.25 X4.15 | 42.8,67.75 42.8,69.9 47.05,69.9 47.05,67.75 | 47.05,67.75 X4.16 | 42.8,67.25 42.8,69.35 | 42.8,69.35 46.95,69.35 46.95,67.25 X4.17 | 42.8,66.75 42.8,69.35 | 42.8,69.4 47.05,69.4 47.05,67.75 | 47.05,67.75 47.05,66.75 X4.18 | 56.23,76.58 v59.95,72.6 | D1.A 64.31,56.64 64.3,56.65 | 69.2,54.9 69.23,54.9 74.7,54.9 | 62.5,51.2 63,51.25 62.45,51.2
  Top 1.016: JP5.1 49.28,77.18 49.3,77.2 | 64.08,68.68 65.6,69.15 74.7,60 74.7,54.95 | 74.7,54.95 74.7,54.9 | v60.4,51.3 74.15,51.3 74.65,51.8 74.65,54.95 74.7,54.95
  Top 1.27: 42.8,60 v45.1,60
  Top 2.8: 56.23,76.58 56.2,77.2 53.25,77.2 52.75,77.2 52.25,77.2 51.75,77.2 51.35,77.2 51.25,77.2 50.75,77.2 49.3,77.2 42.8,77.2 42.8,75.25 42.8,74.75 42.8,74.25 42.8,73.75 42.8,73.25 42.8,72.75 42.8,72.25 42.8,71.75 42.8,71.25 42.8,70.75 42.8,70.25 42.8,69.75 42.8,69.4 42.8,69.35 42.8,69.25 42.8,68.75 42.8,68.25 42.8,67.75 42.8,67.25 42.8,66.75 42.8,66.25 42.8,60 42.8,42.8
  Top 3.81: 56.23,76.58 64.08,68.68
  Bottom 0.254: P7.2 59.95,49.15 59.95,49.25 59.95,50.25
  Bottom 0.813: v68.25,56.9 68.25,59.2 69.2,60.15 | P7.2 60.05,49.15 59.95,49.25 59.9,51.1 60.05,51.2
  Bottom 1.016: 59.95,70.85 J5.4 | v59.95,72.6 59.95,70.85 | 59.95,70.85 P5.2 | 70.85,60.15 J6.4 | 70.85,60.15 P6.2 | 69.2,60.15 70.85,60.15 | v60.4,51.3 60.05,51.2
  Bottom 1.27: P7.2 J7.4 | 49.15,60 J8.4 | v45.1,60 49.15,60 | 49.15,60 P8.2
  pour Top (isolate 0.305, no thermals): 63,57.55 63,51.7 60.05,51.7 60.05,49.95 65.55,49.95 65.55,45.3 78.5,45.3 78.5,56.7 75,60.2 74.25,60.2 74.25,57.5 63.05,57.5
GND_2  (via drill 0.51)
  Top 0.254: 3.75,36.3 X5.50 | 4.25,36.3 4.25,36.45 | 1.7,27.75 1.71,27.75 | 1.7,26.8 1.75,26.75 | 1.7,26.25 | 1.7,25.75 | 1.7,23.45 1.65,25.25 | 1.7,22.95 1.65,24.75 | 14.3,36.3 14.3,36.35 14.25,36.3 X5.29 | 15.25,36.4 15.25,36.3 X5.27 | 18.55,6.45 12.75,12.1 | 4.75,36.3 4.75,36.45 | 5.25,36.3 5.25,36.45 | 5.75,36.3 5.75,36.35 | 6.25,36.3 6.25,36.35 | 7.25,36.3 7.25,36.4 | 7.75,36.3 7.75,36.4 | 8.25,36.3 8.25,36.5 | 8.75,36.3 8.75,36.5 | 9.25,36.3 9.25,36.4 | 9.75,36.3 9.75,36.45 | 10.25,36.3 10.25,36.45 | 10.75,36.3 10.75,36.4 | 11.25,36.35 11.25,36.3 X5.35 11.2,31.6 11.05,31.45 IC8.P$5 | 1.7,25.9 1.65,25.9 1.66,25.91 | 2.95,26.2 2.96,26.21 | 2.95,26.2 2.96,26.19 | 1.7,26.2 2.85,26.2 | 2.85,26.2 2.95,26.2 | X5.45 6.05,31.4 IC8.P$6 IC8.P$7 | IC7.P$6 IC7.P$7 31.9,16.5 33.85,18.45 v33.85,19 | 25.2,1.75 25.2,1.8 25.19,1.81 | 36.2,25.45 36.25,25.45 36.24,25.44 | 3.85,24.6 3.86,24.59 R10.4 | 3.85,24.6 3.86,24.61 | R10.1 | R10.1 R10.2 3.86,25.64 R10.3 3.85,24.6 | 2.85,26.2 2.85,26.25 | 2.95,26.2 2.95,26.25 R10.1 | C8.2 26.48,11.02 25.6,11.9 25.6,13.45 25.59,13.46 C9.2
  Top 0.813: 4.25,36.3 X5.49 | 14.75,36.3 X5.28 | 4.75,36.3 X5.48 | 5.25,36.3 X5.47 | 5.75,36.3 X5.46 | 6.25,36.3 X5.45 | 6.75,36.3 X5.44 | 7.25,36.3 X5.43 | 7.75,36.3 X5.42 | 8.25,36.3 X5.41 | 8.75,36.3 X5.40 | 9.25,36.3 X5.39 | 9.75,36.3 X5.38 | 10.25,36.3 X5.37 | 10.75,36.3 X5.36
  Top 1.016: 25.19,1.81 JP2.1 | 36.24,25.44 JP1.1 | 36.2,10.55 IC6.4 IC6.2 27.3,10.55 26.97,10.88 C8.2
  Top 1.27: 36.2,19 v33.85,19 | 18.55,6.45 v19,6.55 | 5.85,18.6 6.47,18.48 v6.45,19 | v20.5,33.45 20.5,36.25 20.55,36.3
  Top 2.8: 22.9,2.1 22.9,1.9 23.05,1.75 25.2,1.75 36.2,1.75 36.2,10.55 36.2,19 36.2,25.45 36.2,36.3 20.55,36.3 15.25,36.3 14.75,36.3 14.3,36.3 11.25,36.3 10.75,36.3 10.25,36.3 9.75,36.3 9.25,36.3 8.75,36.3 8.25,36.3 7.75,36.3 7.25,36.3 6.75,36.3 6.25,36.3 5.75,36.3 5.25,36.3 4.75,36.3 4.25,36.3 3.75,36.3 1.7,36.3 1.7,27.75 1.7,26.8 1.7,26.25 1.7,26.2 1.7,25.9 1.7,25.75 1.7,23.45 1.7,22.95 2.05,22.9
  Top 3.5: 2.05,22.9 6.47,18.48 18.15,6.85 18.68,6.33 | 18.68,6.33 22.9,2.1 | 18.68,6.33 18.55,6.45
  Bottom 1.016: J9.4 P9.2
  Bottom 1.27: v33.85,19 29.85,19 | 29.85,19 P10.2 | 29.85,19 J10.4 | 18.95,8.15 J11.4 | v19,6.55 19,8.1 18.95,8.15 | 18.95,8.15 P11.2 | 8.15,19 J12.4 | 8.15,19 v6.45,19 | P12.2 8.15,19 | P9.2 20.4,29.85 20.45,29.8 J9.4 v20.5,33.45
INTS  (via drill 0.51)
  Top 0.254: v4.85,53.15 10,53.15 9.78,53.38 | 9.78,53.38 R2.2 | IC1.3 IC1.2 IC1.3 | IC1.3 9.55,59.1 9.85,58.8 9.85,53.45 9.78,53.38 | 9.78,53.38 9.75,53.35 | X2.2 X2.1 30.75,50.75 INT.MP
  Bottom 0.254: INT.MP 29.5,46.8 25.6,42.9 7.8,42.9 4.85,45.85 v4.85,53.15
  Bottom 0.305: INTS.MP 36.45,43.5 34.9,45.05 34.95,48.4 33.9,49.5 INT.MP
  pour Top (isolate 0.305, no thermals): 28.55,50.05 29.05,50.55 30.35,50.55 31.05,51.25 32.1,51.25 32.1,49.75 30.75,48.4 29.05,48.4 28.45,49 28.45,49.95
N$1
  Top 0.254: Q1.1 U1.7
N$2
  Top 0.254: Q1.3 18.8,57.85 19.25,58.3 19.25,58.6 19.9,59.25 U1.8
N$3
  Top 0.254: U1.9 20.1,58.75 19.75,58.4 19.75,58.1 18.5,56.85 16.95,56.85 16.15,56.05 15.35,56.05 12.3,59.1 IC1.6
N$4
  Top 0.254: U1.10 20.3,58.25 20.2,58.15 20.2,57.85 18.75,56.4 17.2,56.4 16.4,55.6 15.15,55.6 12.15,58.6 IC1.5
N$6
  Top 0.254: IC4.6 20.6,56.75 20.93,57.08 U1.11
N$7
  Top 0.254: U1.12 21.7,56.9 21.45,56.9 21.1,56.55 IC4.5
N$8
  Top 0.254: R12.1 19.95,19 20.95,18 IC7.P$1
N$9
  Top 0.254: U1.14 22.75,56.35 21.4,55 20.6,55 19.6,54 IC4.1
N$10  (via drill 0.51)
  Top 0.254: U1.20 25.75,55.75 v26.25,55.25 26.25,55.2 26,54.95 25.65,54.95 22.95,52.25 22.95,50 21.75,48.8 X3.37 | v28.35,55.95 28.6,55.95 29.4,56.75 X2.13
  Bottom 0.254: v28.35,55.95 27.65,55.25 v26.25,55.25
N$11
  Top 0.254: U1.13 22.25,56.5 21.3,55.55 20.1,55.55 IC4.7
N$12
  Top 0.254: X3.39 22.75,48.5 23.85,49.6 23.85,51.85 26,54 26.8,54 27.55,54.75 27.55,56.4 27.1,56.85 26.75,56.85 U1.22
N$13
  Top 0.254: X3.38 22.25,48.65 23.4,49.8 23.4,52.05 25.8,54.45 26.6,54.45 27.1,54.95 27.1,56.1 26.95,56.25 26.4,56.25 26.25,56.4 U1.21
N$14
  Top 0.254: U1.2 19.8,62.25 19.25,62.8 17.4,62.8 16.1,64.1 15.35,64.1 14.8,63.55 14.8,58.85 15.55,58.1 15.57,58.12 X1.2
N$15
  Top 0.254: U1.1 19.95,62.75 19.4,63.3 17.6,63.3 16.35,64.55 15.15,64.55 14.35,63.75 14.35,58.15 15.7,56.8 X1.1
N$16
  Top 0.254: X3.35 20.75,49.1 22.05,50.4 22.05,52.65 22.5,53.1 22.5,54.8 23.75,56.05 U1.16
N$17
  Top 0.254: X3.34 20.25,49.25 21.6,50.6 21.6,52.85 22,53.25 22,54.95 23.25,56.2 U1.15
N$18  (via drill 0.51)
  Top 0.254: U1.19 25.25,56.4 24.8,55.95 v24.8,55.25 24.8,54.8 22.5,52.45 22.5,50.2 21.25,48.95 X3.36 | v28.5,57.3 X2.14
  Bottom 0.254: v24.8,55.25 24.95,55.25 25.75,56.05 26.25,56.05 27.5,57.3 v28.5,57.3
N$19  (via drill 0.51)
  Top 0.254: R12.2 16.65,19 v16,18.35
  Bottom 0.254: LED2.2 17.65,18.4 17.6,18.35 v16,18.35
N$20
  Top 0.254: X4.37 48.45,57.25 49.35,58.15 49.35,60 51.85,62.5 IC9.P$8
N$21
  Top 0.254: X4.38 48.65,56.75 49.85,57.95 49.85,59.75 52.1,62 IC9.P$9
N$22
  Top 0.254: IC10.1 58.95,48.1 58.75,48.3 58.75,54.3 58.62,54.42 C12.1
  pour Top (isolate 0.305, no thermals): 58.05,52.25 58.05,55 59.1,55 59.1,49.15 60.95,49.15 60.95,47 60.4,47 60.55,47 60.55,45.3 58.65,45.3 58.65,52.2 58.65,52.25
N$23
  Top 0.254: R13.1 19.95,17 20.45,17.5 IC7.P$2
N$24  (via drill 0.51)
  Top 0.254: 22.75,70.16 23.05,70.15 v25,68.2 26.25,66.95 U1.35 | 22.75,70.16 | 22.75,70.15 | 22.75,70.16 22.75,70.15 | R1.4 22.49,70.41 22.75,70.15
  Bottom 0.254: P2.3 25,63.5 25,65.3 24.65,65.65 24.65,66.9 25.48,67.72 | J2.1 26.05,56.5 26.3,56.75 26.3,66.45 26.25,66.5 26.25,66.95 25.48,67.72 | 25.48,67.72 v25,68.2
N$25  (via drill 0.51)
  Top 0.254: IC7.P$3 21.4,17 v21.1,16.7 | v21.25,20.8 21.05,21 R11.1
  Bottom 0.254: v21.1,16.7 21.1,17.4 21.25,17.55 v21.25,20.8
N$26  (via drill 0.51)
  Top 0.254: U1.40 23.75,64.55 22.8,65.5 v22.8,67.15 20.15,67.15 20.15,68.75 20.8,69.39 R1.1
  Bottom 0.254: P1.3 15.5,66.45 15.9,66.85 21.8,66.85 22.5,66.15 | 22.5,66.15 22.8,66.15 v22.8,67.15 | 22.5,66.15 J1.1
N$27
  Top 0.254: X2.24 30.85,62.25 29.85,61.25 U1.30
N$28
  Top 0.254: X2.25 30.7,62.75 29.7,61.75 U1.31
N$29
  Top 0.254: X2.26 30.55,63.25 29.55,62.25 U1.32
N$30
  Top 0.254: JP4.2 45.35,49.8 46.3,50.75 X4.50 X4.49
  pour Top (isolate 0.305, no thermals): 47.85,51.25 47.85,50.75 46.35,50.75 45.95,50.35 45.95,42.75 44.7,42.75 44.7,50.5 44.85,50.65 45.85,50.65 46.35,51.15 47.75,51.15
N$31
  Top 0.254: X2.15 29.25,57.75 28.25,58.75 U1.25
N$32
  Top 0.254: U1.3 19.65,61.75 19.05,62.35 16.5,62.35 15.73,63.12 X1.6
N$33  (via drill 0.51)
  Top 0.254: U1.36 25.75,66.05 v25.45,66.05 25.45,66.4 22.25,69.6 | v21.95,68.6 22.25,68.95 22.25,69.6 | 22.25,69.6 22.25,69.65 21.89,70.02 R1.3
  Bottom 0.254: J3.1 14.35,55.6 12.1,55.6 12.1,56.35 11.45,57 11.45,65.5 14.25,68.35 20,68.35 20.55,68.95 21.6,68.95 v21.95,68.6 | P3.3 22.5,56.15 23.85,57.5 25.85,57.5 25.85,66.05 v25.45,66.05
N$34
  Top 0.254: X2.16 29.45,58.25 28.45,59.25 U1.26
N$35
  Top 0.254: R7.1 59.5,60.2 58.65,61.05 IC9.P$1
N$36  (via drill 0.51)
  Top 0.254: X3.41 23.5,47.4 X3.40 | X2.12 31.6,56 X2.11 | IC4.2 IC4.3 20.6,53 20.7,52.9 20.7,51.5 v20,50.8
  Top 0.61: v13.95,54.05 16.65,54.05 16.65,49.6 17.85,49.6 19.05,50.8 v20,50.8
  Top 0.813: 23.5,47.4 23.5,48.2 24.6,49.3 24.6,51.05 26.1,52.55 EXTS.MP 30,56 31.6,56
  Bottom 0.254: 17.5,53.95 17.5,54.15 15.95,55.7 15.45,55.7 14.8,56.35 14.8,57.5 13.95,58.35 13.6,58.35 P4.1 | 25.1,58.5 J2.3 24.05,58.5 | P2.1 24.15,61.65 | J1.3 20.5,65.5 20.55,65.45 20.55,64.85 | P3.1 20.5,54.4 20.45,54.35 20.45,53.95 20.45,53.6 19.1,52.25 19.1,51.3 19.6,50.8 v20,50.8
  Bottom 0.406: J1.3 20.5,66.3 17.5,66.3 P1.1
  Bottom 0.61: 17.5,54.25 16.15,52.9 15.1,52.9 v13.95,54.05
  Bottom 0.813: EXTS.MP 24.8,50.8 v20,50.8 | 17.5,53.95 17.5,54.25 J3.3 | P4.1 J4.3 | 25.1,58.5 25.1,61.5 P2.1 | 24.05,58.5 23.45,58.5 20.45,55.5 20.45,53.95 | 24.15,61.65 20.95,64.85 20.55,64.85 | P1.1 17.45,65.55
N$37  (via drill 0.51)
  Top 0.254: U1.4 19.5,61.25 18.85,61.9 15.75,61.9 15.73,61.88 X1.5 | IC5.1 17.31,66.09 18.2,65.2 v19,65.2
  Bottom 0.254: v19,65.2 19,64.75 16.15,61.9 15.7,61.9 X1.5
N$38
  Top 0.254: U1.42 22.75,64.15 22.3,64.6 21.55,64.6 20.7,63.75 17.8,63.75 16.55,65 14.95,65 12.75,62.8 12.75,60.05 12.3,59.6 IC1.7
N$39  (via drill 0.51)
  Top 0.254: R7.2 62.75,61.1 v62.75,61.45
  Bottom 0.254: v62.75,61.45 62.2,61.45 61.35,60.6 LED3.2
N$40  (via drill 0.51)
  Top 0.254: U1.37 25.25,65.05 24.65,65.65 24.65,66.5 23.2,67.94 22.45,67.94 22.15,67.65 21.3,67.65 20.95,68 v20.95,68.09 20.95,68.84 21.39,69.29 R1.2
  Bottom 0.254: P4.3 12.75,56.5 12,57.2 12,63.5 | 12,63.5 12,65.15 14.7,67.85 20.95,67.85 v20.95,68.09 | 12,63.5 J4.1
N$41
  Top 0.254: U1.41 23.25,64.3 22.5,65.05 21.35,65.05 20.5,64.2 18,64.2 16.75,65.45 14.45,65.45 IC1.1
N$42
  Top 0.254: R18.1 R17.2 | R17.2 64.55,45.75 | IC10.4 64.5,48.01 64.5,48 R17.2
  pour Top (no thermals): 61.45,46.3 64.15,46.3 64.15,49.2 64.95,49.2 64.95,45.25 61.45,45.25
N$43
  Top 0.254: R6.1 61.6,62.75 61.6,62.05 60.75,61.2 60.25,61.2 59.45,62 IC9.P$2
N$44  (via drill 0.51)
  Top 0.254: R6.2 60.65,62.25 v60.5,62.1
  Bottom 0.254: v60.5,62.1 59.15,62.1 59.15,60.9 58.85,60.6 LED3.4
N$45  (via drill 0.51)
  Top 0.254: X4.26 49.2,62.75 49.7,63.25 v49.7,64.95 49.65,64.95 49.65,65.45 50.3,66.1 50.3,69 51.55,70.25 53.95,70.25 54.85,69.35 | 54.85,69.35 54.85,69.34 | R5.1 56.41,67.8 54.85,69.35
  Bottom 0.254: P7.3 62.2,53.15 56.5,53.15 | 56.5,53.15 52.75,53.15 50.4,55.5 50.4,64.25 v49.7,64.95 | 56.5,53.15 J7.1
N$46  (via drill 0.51)  (1 unrouted)
  Top 0.254: X4.40 47.4,56.15 47.5,56.25 X4.39 X4.40 | X4.40 47.4,55.95 47.45,56
  Top 0.813: 47.45,56 49.05,56 50.6,57.6 50.6,59.45 51.55,60.4 v52.8,60.4
  Bottom 0.254: 55.15,58.5 55.2,58.45
  Bottom 0.813: v52.8,60.4 54.3,60.4 | 55.15,58.5 P8.1 J8.3 55.1,61.55 55.8,62.25 57.1,63.5 58.5,64.9 P5.1 61.45,65.55 61.5,65.6 J5.3 61.5,64.8 64.8,61.5 65.45,61.5 65.5,61.45 P6.1 J6.3 64.85,58.5 61.5,55.15 P7.1 58.6,54.45 58.55,54.4 J7.3 | 58.5,54.75 58.5,55.15 55.2,58.45
N$47
  Top 0.254: R8.1 59.65,64 59.65,62.7 59.45,62.5 IC9.P$3
N$48  (via drill 0.51)
  Top 0.254: 50.55,65.5 v50.85,65.2 | 50.55,65.5 50.55,63.3 49.5,62.25 X4.27 | 50.55,65.5 50.85,65.8 50.85,68.65 51.95,69.75 53.7,69.75 56.25,67.2 R5.2
  Bottom 0.254: P8.3 53.15,56.5 51.75,57.9 51.75,63.5 | 51.75,63.5 51.75,64.3 v50.85,65.2 | 51.75,63.5 J8.1
N$49  (via drill 0.51)
  Top 0.254: v16.75,21 R11.2
  Bottom 0.254: v16.75,21 17.35,20.4 19.3,20.4 LED2.3
N$50  (via drill 0.51)
  Top 0.254: X4.35 48.1,58.25 48.35,58.5 48.35,60.4 51.7,63.75 51.7,67.65 v53,68.95 53.8,68.95 54.49,68.25 | 54.49,68.25 54.5,68.25 | 54.49,68.25 56.05,66.7 R5.3
  Bottom 0.254: J6.1 66.1,56.5 66.8,57.2 66.8,63 66.3,63.5 P6.3 65.55,66.9 63.95,68.5 53.45,68.5 v53,68.95
N$51  (via drill 0.51)
  Top 0.254: v16.75,17 R13.2
  Bottom 0.254: v16.75,17 17.3,17.55 19.2,17.55 20.05,18.4 LED2.4
N$52  (via drill 0.51)
  Top 0.254: v53.7,67.65 52.2,66.15 52.2,63.5 48.85,60.15 48.85,58.35 48.25,57.75 X4.36 | v53.7,67.65 | v53.7,67.65 54.45,67.65 56,66.1 56.6,66.1 R5.4
  Bottom 0.254: v53.7,67.65 55.8,65.55 P5.3 56.5,66.45 58.05,68 62,68 63.5,66.5 J5.1
N$54  (via drill 0.51)
  Top 0.254: 23.75,31.35 X5.10 | 23.75,31.35 23.6,31.35 23.5,31.25 | 23.75,31.35 23.5,31.35 X5.11
  Top 0.813: v22.15,22.4 22.15,22.35 23.5,23.7 23.5,31.25
  Bottom 0.254: J11.3 17.45,13.5 17.5,13.55 17.5,14 | 23.9,17.5 J10.3
  Bottom 0.813: J12.3 13.9,20.5 17.5,24.1 P9.1 J9.3 20.5,24.05 v22.15,22.4 24.05,20.5 P10.1 J10.3 | P11.1 20.5,14.1 23.9,17.5 | P11.1 20.55,13.45 | J11.3 P11.1 | P12.1 14,17.5 17.5,14
N$56  (via drill 0.51)
  Top 0.254: v63.7,60.7 63.7,63.65 R8.2
  Bottom 0.254: v63.7,60.7 63.7,60 61.9,58.2 59.95,58.2 58.8,59.35 LED3.3
N$57
  Top 0.254: L2.1 53.55,53.8 54.25,54.5 C12.2 56.88,54.52 56.9,54.55 56.9,56.1 57.42,56.62 D1.C 60.07,56.62 60.05,56.6 60.7,55.95 IC10.8
  pour Top (isolate 0.305, no thermals): 48.5,52.25 57.35,52.25 57.35,55.75 59.8,55.75 59.8,52.3 60.95,52.3 60.95,59.05 52.2,59.05 52.2,57.15 49.35,54.3 48.5,54.3
N$58
  Top 0.254: IC8.P$1 12,26.95 12.8,26.15 R14.1
N$59  (via drill 0.51)
  Top 0.254: X4.23 v45.3,64.25 45.8,64.75 X4.22 X4.21 X4.20 | v45.3,61.75 X4.28 | 45.75,58.75 X4.34 | X4.41 45.8,55.25 v45.3,54.75 | IC10.7 61.97,58.02 62.6,58.65 64.25,58.65 66.45,60.85 69.05,60.85 69.16,60.95 C11.+ | v45.3,51.75 X4.48
  Top 0.813: 45.8,61.25 X4.29 | v45.3,61.75 45.8,61.25 | 46.3,60.75 X4.30 | 45.8,61.25 46.3,60.75 | X4.31 46.8,60.25 46.3,60.75 | v45.3,58.3 45.75,58.75 46.25,59.25 | 46.25,59.25 X4.33 | X4.32 46.75,59.75 46.25,59.25 | 45.8,53.75 X4.44 | 45.8,52.25 X4.47 | v45.3,54.75 X4.42 | 45.8,54.25 X4.43 | v45.3,53.25 X4.45 | 45.8,52.75 X4.46 | C11.+ 69.2,60.95 68.15,62 v68.15,64.7
  Top 1.016: 45.8,53.75 v45.3,53.25 45.8,52.75 | v45.3,51.75 45.8,52.25 | v45.3,54.75 45.8,54.25
  Bottom 0.254: 63.5,71.3 J5.2 | 58.25,75.2 59.1,75.7
  Bottom 0.813: 59.62,75.17 59.1,75.7 | 63.5,71.3 59.62,75.17 | P5.4 56.5,71.35 58.2,73.05 58.2,73.7 59.62,75.17 | 71.3,63.5 P6.4 70.85,63.95 69.15,65.65 | 71.3,63.5 77.7,57.1 77.7,56.7 77.2,56.2 | J6.2 71.2,56.5 74.05,59.35 | 63.5,71.3 63.5,71.35 | 71.3,63.5 69.15,65.65 | 69.15,65.65 63.5,71.3 | 69.15,65.65 69.1,65.65 v68.15,64.7
  Bottom 1.016: 63.5,42.8 P7.4 | 56.5,42.75 56.5,42.8 J7.2 | 42.8,63.5 J8.2 | 42.8,56.5 P8.4 | 42.8,64.25 v45.3,64.25 | 42.8,61.75 v45.3,61.75 | 42.8,58.3 v45.3,58.3
  Bottom 1.676: 42.8,54.75 v45.3,54.75 | 42.8,53.25 v45.3,53.25 | 42.8,51.75 v45.3,51.75
  Bottom 2.54: 77.2,56.2 74.05,59.35
  Bottom 2.8: 58.25,75.2 56.2,77.2 42.8,77.2 42.8,64.25 42.8,63.5 42.8,61.75 42.8,58.3 42.8,56.5 42.8,54.75 42.8,53.25 42.8,51.75 42.8,48.7 53.2,48.7 56.5,45.4 56.5,42.8 63.5,42.8 77.2,42.8 77.2,56.2
  pour Top (isolate 0.305, no thermals): 61.65,52.3 62.25,52.3 62.25,58.3 73.35,58.3 73.35,59.6 73.3,59.65 73.35,59.7 67.15,65.9 64.65,65.9 64.65,59.1 61.95,59.1 61.75,59.1 61.65,59.1
  pour Top (isolate 0.305, no thermals): 47.85,65.75 47.85,64.25 46.05,64.25 46.05,63.95 45.75,63.65 45.05,63.65 44.7,64 44.7,65.75
N$60
  Top 0.254: R15.1 15.5,25.95 14.8,25.25 10.6,25.25 9.7,26.15 9.7,26.9 10.25,27.45 IC8.P$2
N$61
  Top 0.254: IC8.P$3 11.85,27.95 12.8,27 16.75,27 17.5,26.25 R16.1
N$62
  Top 0.254: R14.2 13.5,30.55 13.75,30.8 X5.30
N$63  (via drill 0.51)
  Top 0.254: X5.16 20.75,28.95 19.1,27.3 v19.1,25.9 19.1,23.85 18.8,23.55 7.55,23.55 5.45,25.65 4.85,25.65 4.84,25.66 R10.7
  Bottom 0.254: J9.1 22.4,24.55 21.05,25.9 v19.1,25.9 15.5,25.9 P9.3
N$64  (via drill 0.51)
  Top 0.254: X5.13 22.25,26.35 18.65,22.75 v9.85,22.75 7.55,22.75 5.14,25.16 R10.6
  Bottom 0.254: P11.3 22.4,13.45 20.95,12 16.15,12 15.5,12.65 J11.1 12.95,13.45 9.5,16.9 9.5,22.4 v9.85,22.75
N$65
  Top 0.254: R15.2 15.5,28.15 16.3,28.95 17.4,28.95 19.25,30.8 X5.19
N$66  (via drill 0.51)
  Top 0.254: X5.12 22.75,26.15 18.55,21.95 v11.95,21.95 7.4,21.95 4.79,24.56 R10.5
  Bottom 0.254: P12.3 13.45,15.7 12.1,17.05 12.1,22.1 12.5,22.5 | 12.5,22.5 v11.95,21.95 | 12.5,22.5 J12.1
N$67
  Top 0.254: R16.2 17.5,28.35 19.75,30.6 X5.18
N$68  (via drill 0.51)
  Top 0.813: v3.6,54.3 4.56,54.31 7.6,54.31 | v7.05,42 7.3,41.75 32.8,41.75 REG.MP
  Top 1.016: C4.1 8.2,54.3 7.75,54.3 7.7,54.25 7.64,54.31 7.6,54.31 7.6,54.3 7.61,54.31 IC3.3
  Bottom 0.813: v3.6,54.3 3.6,45.45 v7.05,42
N$69  (via drill 0.51, 0.51 pad 0.25)
  Top 0.254: U1.38 24.75,64.7 v23.87,65.61 | v23.7,54.85 23.7,55.35 24.25,55.9 U1.17 | 18.8,54.85 18.8,51.95 v19.9,51.95 | U1.5 19.3,60.75 18.6,61.45 17.4,61.45 16.55,60.6 15.75,60.6 15.73,60.62 X1.4 | v10.45,60.1 IC1.8 | 18.8,54.85 12.9,54.85 v12.4,54.35 11.5,53.45 11.35,53.45 R2.1 11.3,53.5 | IC4.8 19.6,55.65 18.8,54.85 | 29.34,68.61 28.96,68.61 27.65,67.3 L1.1 27.65,66.85 28.4,66.1 30.4,66.1 30.6,65.9 30.6,63.95 30.8,63.75 X2.27 | C6.1 19.7,69.46 19.71,69.46 v19.45,69.2 19.45,68.7 19.21,68.46 19.2,68.46 19.2,67.69 IC5.2
  Top 0.61: 29.31,68.61 29.34,68.61
  Top 0.813: C2.1 29.31,68.61 IC2.3 v29.31,74.59
  Top 1.27: IC2.3 v29.31,74.59 v29.3,74.6
  Bottom 0.254: v12.4,54.35 11.55,55.2 11.55,56.05 10.45,57.15 10.45,59.7 | 23.9,65.6 v23.87,65.61 | v23.7,54.85 23.7,53.65 23.2,53.15 21.1,53.15 v19.9,51.95 | 10.45,59.7 10.45,65.5 14.45,69.5 19.15,69.5 | 19.15,69.5 23.9,69.5 | 23.9,67.95 22.45,67.95 21.8,67.3 15.45,67.3 14.4,66.25 14.4,64.55 14.75,64.2 14.75,61.6 15.7,60.65 X1.4 15.7,60.6 LED1.1 | 10.45,59.7 v10.45,60.1 | 19.15,69.5 v19.45,69.2
  Bottom 0.813: v29.31,74.59 28.65,73.9 26.5,73.9 23.9,71.25 23.9,69.5 23.9,67.95 23.9,65.6
N$75  (via drill 0.51)
  Top 0.254: U1.27 v29.25,59.75 | L1.2 27.7,65.15 27.77,65.22 28.05,65.22 | 28.05,65.22 C5.2 | 28.05,65.22 28.05,65.15 28.25,64.95 v28.25,63.8
  Bottom 0.254: v29.25,59.75 28.55,60.45 28.55,63.5 v28.25,63.8
N$100  (via drill 0.51)
  Top 0.254: X5.17 20.25,29.65 v19.1,28.5 | v4.35,27.5 4.8,27.05 4.8,26.35 4.76,26.31 R10.8
  Bottom 0.254: J10.1 24.55,15.6 25.75,15.6 27,16.85 27,23.15 26.7,23.45 26.7,24.65 | 26.7,24.65 26.7,27.3 25.5,28.5 v19.1,28.5 5.35,28.5 v4.35,27.5 | 26.7,24.65 P10.3
RCH_M  (via drill 0.51)
  Top 0.254: v13.7,52.1 13.75,52.05 X3.21
  Bottom 0.254: v13.7,52.1 13.85,52.25 16.45,52.25 16.8,52.6 17.4,52.6 18.4,53.6 18.4,55.3 17.8,55.9 LED1.2
SCL-L  (via drill 0.51)
  Top 0.254: X5.15 21.25,28.3 v20.6,27.65 | v8.25,27.65 7.95,27.95 IC8.P$8 | 29.05,26.55 29.05,17.2 28.85,17 IC7.P$8 26,17 23.15,14.15 R4.2 23.6,13.45 24.45,12.6 v24.45,10.9 | 29.05,26.55 27.95,27.65 v25.15,27.65 | JP1.2 30.48,27.98 29.05,26.55
  Bottom 0.254: v8.25,27.65 v20.6,27.65 20.85,27.9 24.9,27.9 v25.15,27.65 | v24.45,10.9 24.4,7 24.85,6.55 26.85,6.55 27.73,5.67 JP2.2
SDA-L  (via drill 0.51)
  Top 0.254: X5.14 21.75,27.1 v21.4,26.75 | v7.45,26.75 6.75,27.45 IC8.P$9 | IC7.P$9 28.4,17.5 28.55,17.65 28.55,24.85 | 28.55,24.85 28.55,25.65 27.85,26.35 v24.75,26.35 24.35,26.75 24.35,28.4 26.47,30.52 JP1.3 | 28.55,24.85 v27.5,23.8 | R3.2 23.15,9.95 23.7,9.4 31.8,9.4 v32.4,8.8
  Bottom 0.254: v7.45,26.75 v21.4,26.75 21.45,26.7 24.4,26.7 v24.75,26.35 | 32.42,8.8 32.42,9.83 27.5,14.75 v27.5,23.8 | 32.42,8.8 32.42,7.17 30.25,5 JP2.3 | 32.42,8.8 v32.4,8.8
VDD-R  (via drill 0.51)
  Top 0.254: X4.24 48.1,63.75 48.35,64 48.35,67.8 v48.7,68.15 48.7,69.65 50.75,71.7 C7.1 51.85,71.75 | v53.65,66.3 53.65,64.65 52.7,64.65 52.7,63.2 52.9,63 IC9.P$7 54.85,63 54.85,61.65 | 51.85,71.75 R9.1 | JP5.2 51.82,71.78 51.85,71.75 | IC9.P$10 54.7,61.5 54.85,61.65 | v56.45,61.1 55.9,61.65 54.85,61.65
  Bottom 0.254: v48.7,68.15 51.8,68.15 v53.65,66.3 | v56.45,61.1 58.5,63.15 61.2,63.15 61.7,62.65 61.7,61.7 61.3,61.3 60.2,61.3 60.05,61.15 60.05,59.6 60.25,59.4 LED3.1
VDD_2  (via drill 0.51)
  Top 0.254: 24.5,18 24.4,18 22.45,19.95 v16,19.95 15.35,19.3 v10.8,19.3 | 24.5,18 IC7.P$10 | IC8.P$10 6.05,26.85 7.25,25.65 9.15,25.65 9.15,25.4 10.1,24.45 v10.8,24.45 | 24.5,18 24.5,16.85 23.65,16 IC7.P$5 21.75,16 21.45,15.7 R4.1 21.45,11.65 21.4,11.6 R3.1 21.5,11.5 21.45,11.45
  Top 0.61: C8.1 21.02,8.08 10.8,18.3 10.8,19.15 10.75,19.2 10.8,19.25 v10.8,19.3
  Top 1.016: IC6.3 29.8,8.25 | IC6.3 | C8.1 29.63,8.08 IC6.3
  Bottom 0.254: v16,19.95 16.5,19.45 17.5,19.45 17.65,19.6 LED2.1 | v10.8,19.3 v10.8,24.45

## Text on the board
tNames: GN | 5V | AD | Right Board | Main Board | CCSL Molecubes II 2006 | GN | INT | 10V | 18V | SDA | SCL | GN | Left Board | GN | SCL | SDA | 18V
bNames: Molecube II | SC | RIGHT | /RS | V | G | MI | MO | CCSL 2007 | LEFT